# Altium PCB uart.PcbDoc (part 1 of 3)
Units mil, origin at the board's own origin, x right, y up, seen from the top; angles counter-clockwise.
Board outline 2765.94 x 3947.04 mil, 2 copper layers (Top Layer, Bottom Layer); 105 components, 93 nets, 344 pads, 42 vias.
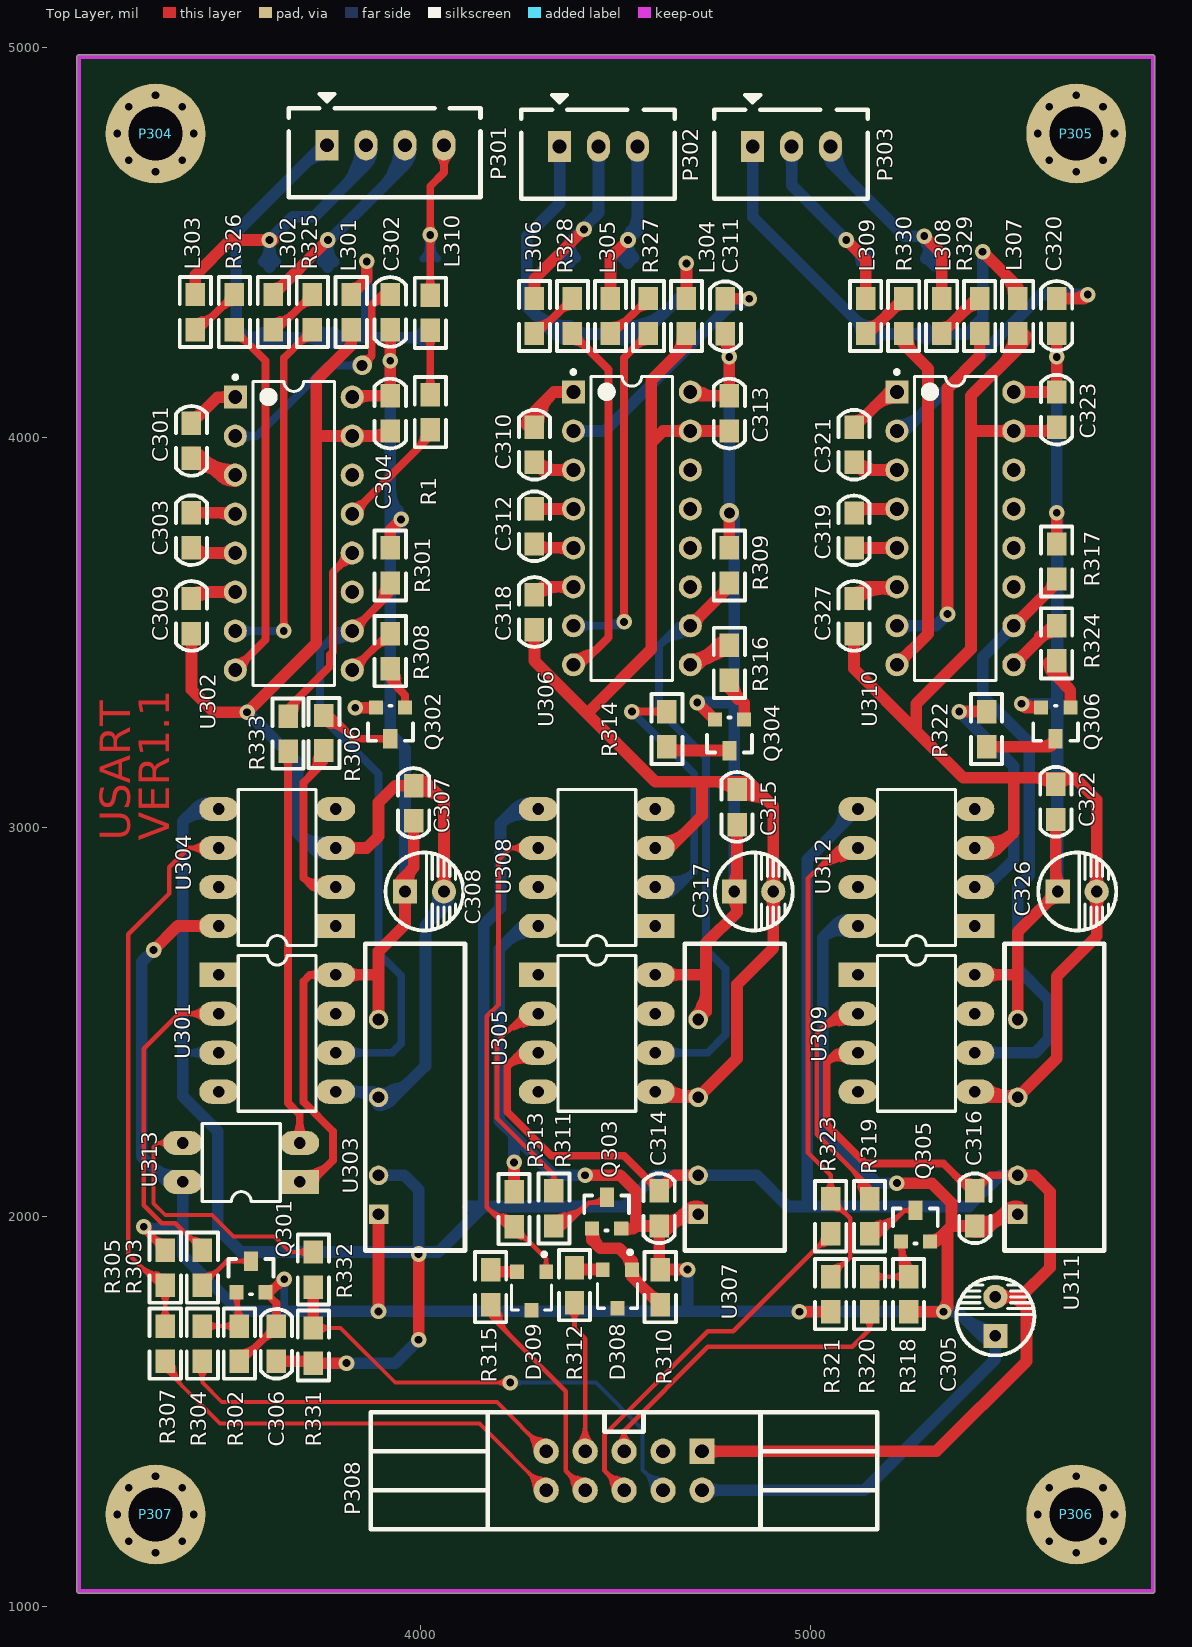
[diagram p0: Top Layer view]
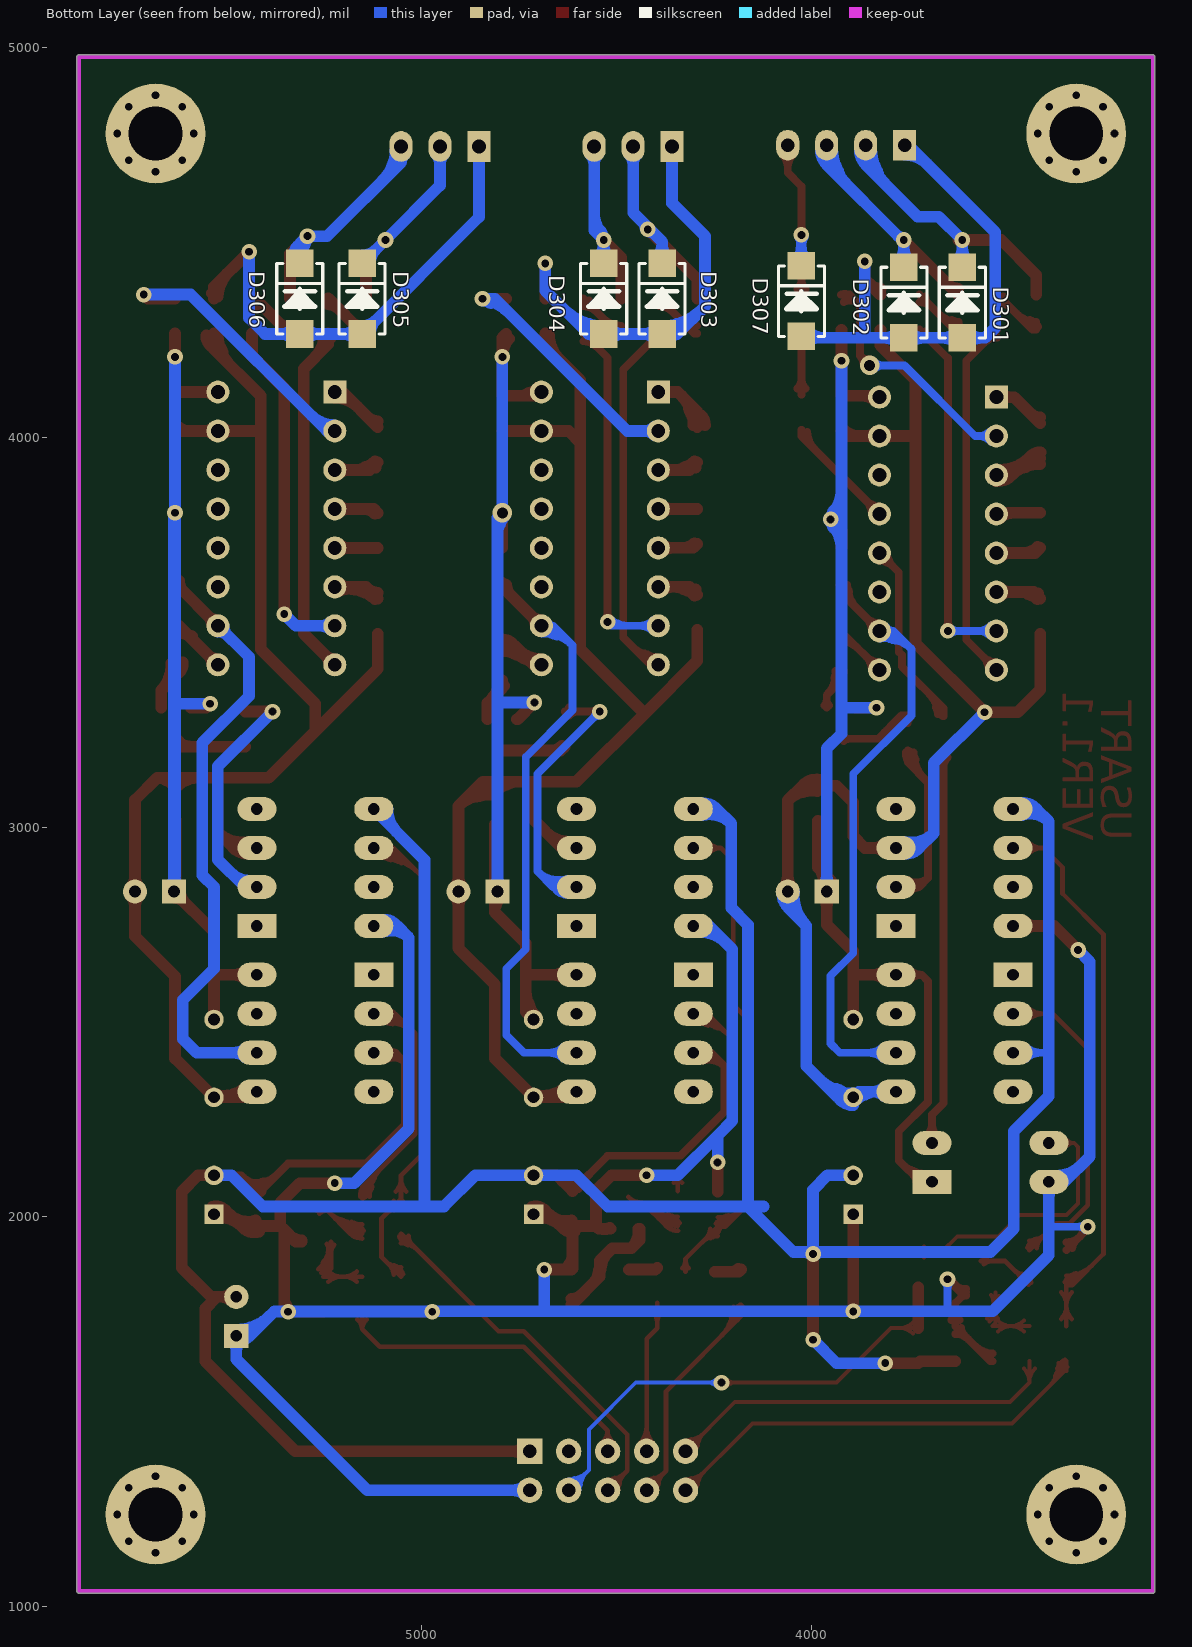
[diagram p1: Bottom Layer view, seen from below]

## Layer stack, top to bottom
Top Layer: signal copper 1.4
Dielectric: dielectric 12.6, FR-4, Dk 4.8
Bottom Layer: signal copper 1.4

## Board outline
3118.13,1039.84 ccw(c3123.15,1039.84) 3123.15,1034.83 5879.06,1034.83 ccw(c5879.06,1039.84) 5884.07,1039.84 5884.07,4976.85 ccw(c5879.06,4976.85) 5879.06,4981.87 3123.15,4981.87 ccw(c3123.15,4976.85) 3118.13,4976.85

## Design rules (kind name [scope] priority, off if disabled: settings)
Clearance [All] p1: gap=10
ComponentClearance [All] p1: gap=0 collisioncheckmode=3 verticalgap=0 showdistances=FALSE
PolygonConnect [All] p1: connectstyle=Relief reliefconductorwidth=10 reliefentries=4 polygonreliefangle="90 Angle"
RoomDefinition uart [InComponentClass('uart')] p1 off: confinementstyle=ConfineIn formatcopy=TRUE lockcomponents=FALSE outline 3173.31,1086.3 5833.31,1086.3 5833.31,4926.3 3173.31,4926.3
RoutingVias [All] p1: holewidth=28 width=50 viastyle="Through Hole" minholewidth=20 minwidth=40 maxholewidth=28 maxwidth=50
SilkscreenOverComponentPads [All] p1: minsilkscreentomaskgap=10
SolderMaskExpansion [All] p1: expansion=4
Width [All] p1: maxlimit=100 minlimit=10 preferedwidth=10
26 further rules are at their usual default settings.

## Components (designator, comment, footprint, x,y, rotation, side; value= is the part's Value field where it differs from the comment)
C301 "100nF" C0805 3412.2,4036.85 r270 top
C302 "100nF" C0805 3922.2,4276.85 r90 top
C303 "100nF" C0805 3412.2,3716.85 r90 top
C304 "100nF" C0805 3922.2,4106.85 r270 top
C305 "100uF/16V" CD1/2 5475,1795 r0 top
C306 "100nF" C0805 3630,1720 r270 top
C307 "100nF" C0805 3982.2,3016.85 r90 top
C308 "47uF/16V" CD1/2 4060,2835 r270 top
C309 "100nF" C0805 3412.2,3496.85 r90 top
C310 "100nF" C0805 4292.2,4026.85 r270 top
C311 "100nF" C0805 4782.2,4265.85 r90 top
C312 "100nF" C0805 4292.2,3726.85 r90 top
C313 "100nF" C0805 4792.2,4106.85 r270 top
C314 "100nF" C0805 4612.2,1976.85 r90 top
C315 "100nF" C0805 4812.2,3006.85 r90 top
C316 "100nF" C0805 5422.2,1976.85 r90 top
C317 "47uF/16V" CD1/2 4905,2835 r270 top
C318 "100nF" C0805 4292.2,3506.85 r90 top
C319 "100nF" C0805 5112.2,4026.85 r270 top
C320 "100nF" C0805 5632.2,4266.85 r90 top
C321 "100nF" C0805 5112.2,3716.44 r90 top
C322 "100nF" C0805 5630,3020 r90 top
C323 "100nF" C0805 5632.2,4116.85 r270 top
C326 "47uF/16V" CD1/2 5735,2835 r270 top
C327 "100nF" C0805 5112.2,3496.85 r90 top
D301 "SMA6J18CA" SMA 3612.2,4346.3 r90 bottom
D302 "SMA6J18CA" SMA 3762.2,4346.3 r90 bottom
D303 "SMA6J18CA" SMA 4382.2,4356.3 r90 bottom
D304 "SMA6J18CA" SMA 4532.2,4356.3 r90 bottom
D305 "SMA6J18CA" SMA 5152.2,4356.3 r90 bottom
D306 "SMA6J18CA" SMA 5312.2,4356.3 r90 bottom
D307 "SMA6J18CA" SMA 4025,4350 r90 bottom
D308 "BAV99" SOT-23#1 4505,1815 r180 top
D309 "BAV99" SOT-23#1 4285,1810 r180 top
L301 "BLM21AG601SN1" L0805 3822.2,4276.85 r90 top
L302 "BLM21AG601SN1" L0805 3622.2,4276.85 r90 top
L303 "BLM21AG601SN1" L0805 3422.2,4276.85 r90 top
L304 "BLM21AG601SN1" L0805 4682.2,4266.85 r90 top
L305 "BLM21AG601SN1" L0805 4487.2,4266.85 r90 top
L306 "BLM21AG601SN1" L0805 4292.2,4266.85 r90 top
L307 "BLM21AG601SN1" L0805 5532.2,4266.85 r90 top
L308 "BLM21AG601SN1" L0805 5337.2,4266.85 r90 top
L309 "BLM21AG601SN1" L0805 5142.2,4266.85 r90 top
L310 "BLM21AG601SN1" L0805 4025,4275 r90 top
P301 "COM1" TJC3-4A 3760,4750 r0 top (schematic designator P1)
P302 "COM1" TJC3-3A 4356.78,4746.85 r0 top
P303 "COM1" TJC3-3A 4852.2,4746.85 r0 top
P304 "Header 9" LK 3320,4780 r0 top
P305 "Header 9" LK 5682.2,4780 r0 top
P306 "Header 9" LK 5682.2,1236.69 r0 top
P307 "Header 9" LK 3320,1236.69 r0 top
P308 "Header 5X2" IDC10-EJ 4722.2,1398.74 r180 top
Q301 "MMBT3906" SOT-23#2 3527.2,1806.85 r0 top
Q302 "MMBT3906" SOT-23#2 3960.2,3306.85 r180 top
Q303 "MMBT3906" SOT-23#2 4440,1970 r0 top
Q304 "MMBT3906" SOT-23#2 4830.2,3276.85 r180 top
Q305 "MMBT3906" SOT-23#2 5232.2,1936.85 r0 top
Q306 "MMBT3906" SOT-23#2 5667.2,3306.85 r180 top
R1 "100" R0805 4025,4110 r270 top
R301 "3.3K" R0805 3922.2,3716.85 r270 top
R302 "10K" R0805 3535,1720 r270 top
R303 "330" R0805 3440,1825 r90 top
R304 "3.3K" R0805 3440,1630 r90 top
R305 "3.3K" R0805 3345,1825 r90 top
R306 "330" R0805 3752.2,3286.85 r270 top
R307 "33" R0805 3345,1720 r270 top
R308 "3.3K" R0805 3922.2,3406.85 r90 top
R309 "3.3K" R0805 4792.2,3716.85 r270 top
R310 "10K" R0805 4615,1775 r90 top
R311 "330" R0805 4342.2,2066.85 r270 top
R312 "3.3K" R0805 4395,1780 r90 top
R313 "3.3K" R0805 4240,1975 r90 top
R314 "330" R0805 4632.2,3206.85 r90 top
R315 "33" R0805 4180,1865 r270 top
R316 "3.3K" R0805 4792.2,3376.85 r90 top
R317 "3.3K" R0805 5632.2,3726.85 r270 top
R318 "10K" R0805 5252.2,1846.85 r270 top
R319 "330" R0805 5152.2,2046.85 r270 top
R320 "3.3K" R0805 5152.2,1756.85 r90 top
R321 "3.3K" R0805 5052.2,1846.85 r270 top
R322 "330" R0805 5452.2,3206.85 r90 top
R323 "33" R0805 5052.2,2046.85 r270 top
R324 "3.3K" R0805 5632.2,3426.85 r90 top
R325 "100" R0805 3722.2,4366.85 r270 top
R326 "100" R0805 3522.2,4366.85 r270 top
R327 "100" R0805 4584.7,4356.85 r270 top
R328 "100" R0805 4389.7,4356.85 r270 top
R329 "100" R0805 5434.7,4356.85 r270 top
R330 "100" R0805 5239.7,4356.85 r270 top
R331 "10K" R0805 3725,1625 r90 top
R332 "5.1K" R0805 3725,1820 r90 top
R333 "3.3K" R0805 3660,3195 r90 top
U301 "6N137" DIP8 3482.2,2621.42 r0 top
U302 "MAX232ACPE" PE16A 3674.72,3753.7 r0 top
U303 "MORNSUN-BLS" MORNSUN-BLS 3892.2,2006.85 r270 top
U304 "6N137" DIP8 3782.2,2746.85 r180 top
U305 "6N137" DIP8 4302.2,2621.42 r0 top
U306 "MAX232ACPE" PE16A 4542.2,3766.85 r0 top
U307 "MORNSUN-BLS" MORNSUN-BLS 4712.2,2006.85 r270 top
U308 "6N137" DIP8 4602.2,2746.85 r180 top
U309 "6N137" DIP8 5122.2,2621.42 r0 top
U310 "MAX232ACPE" PE16A 5372.2,3766.85 r0 top
U311 "MORNSUN-BLS" MORNSUN-BLS 5532.2,2006.85 r270 top
U312 "6N137" DIP8 5422.2,2746.85 r180 top
U313 "TLP521" DIP4 3690,2090 r90 top

## Footprints (in the part's own frame and the unit in brackets; to place one, negate y for a bottom-side part, rotate by r counter-clockwise, add the part's x,y. Pads: shape width x height; smd on the part's side, far side on the other; paste and mask are expansions set on the pad)
C0805 [mil]
  rect 60x50 smd: 1(0,0) 2(90,0)
  silkscreen extent -44,-40 135,40
CD1/2 [mil]
  rect 62x62 hole 30: 1(0,-100)
  round 62 hole 30: 2(0,0)
  silkscreen extent -100,-150 100,50
DIP4 [mil]
  rect 62x100 hole 30: 1(0,0)
  oval 62x100 hole 30: 2(100,0) 3(100,300) 4(0,300)
  silkscreen extent -50,50 150,250
DIP8 [mil]
  rect 100x62 hole 30: 1(0,0)
  oval 100x62 hole 30: 2(0,-100) 3(0,-200) 4(0,-300) 5(300,-300) 6(300,-200) 7(300,-100) 8(300,0)
  silkscreen extent 50,-350 250,50
IDC10-EJ [mil]
  rect 65x65 hole 35: 1(0,0)
  round 65 hole 35: 2(0,100) 3(100,0) 4(100,100) 5(200,0) 6(200,100) 7(300,0) 8(300,100) 9(400,0) 10(400,100)
  silkscreen extent -450,-100 850,200
L0805 [mil]
  rect 60x50 smd: 1(0,0) 2(90,0)
  silkscreen extent -45,-40 135,40
LK [mm]
  round 6.5 hole 3.5: 1(0,0)
  round 1 hole 0.5: 2(0,2.5) 3(2.5,0) 4(0,-2.5) 5(-1.75,-1.75) 6(-1.75,1.75) 7(1.75,1.75) 8(1.75,-1.75) 9(-2.5,0)
MORNSUN-BLS [mil]
  rect 50x50 hole 30: 1(0,0)
  round 50 hole 30: 2(-100,0) 4(-300,0) 6(-500,0)
  silkscreen extent -694,-34 93,222
PE16A [mm] "DIP, 16-Leads, Row Spacing 7.62mm, Pitch 2.54mm, Body 19.18x6.99mm"
  rect 1.5x1.5 hole 0.9: 1(-3.81,8.89)
  round 1.5 hole 0.9: 2(-3.81,6.35) 3(-3.81,3.81) 4(-3.81,1.27) 5(-3.81,-1.27) 6(-3.81,-3.81) 7(-3.81,-6.35) 8(-3.81,-8.89) 9(3.81,-8.89) 10(3.81,-6.35) 11(3.81,-3.81) 12(3.81,-1.27) 13(3.81,1.27) 14(3.81,3.81) 15(3.81,6.35) 16(3.81,8.89)
  silkscreen extent -3.93,-9.9 2.65,10.31, body extent -3.3,-9.9 3.3,9.9, height 5.08
R0805 [mil]
  rect 60x50 smd: 1(0,0) 2(90,0)
  silkscreen extent -45,-40 135,40
SMA [mm]
  rect 1.8x1.8 smd: 1(-2.3,0) 2(2.3,0)
  silkscreen extent -2.3,-1.5 2.3,1.5
SOT-23#1 [mm] "SOT-23; 3 Leads; Body 3.0 x 2.6 mm, inc. leads (LxW max)"
  rect 0.9x0.95 smd: 1(-0.95,-1.25) 2(0.95,-1.25) 3(0,1.25)
  silkscreen extent -1.3,-2.52 1.3,1.25
SOT-23#2 [mm]
  rect 0.914x0.914 smd: 1(0,0) 2(1.905,0)
  rect 0.914x1.27 smd: 3(0.965,2.032)
  silkscreen extent -0.51,-0.13 2.41,2.16
TJC3-3A [mm]
  rect 1.5x2 hole 0.9: 1(0,0)
  oval 1.5x2 hole 0.9: 2(2.54,0) 3(5.08,0)
  silkscreen extent -2.5,-3.4 7.5,3.35
TJC3-4A [mm]
  rect 1.5x2 hole 0.9: 1(0,0)
  oval 1.5x2 hole 0.9: 2(2.54,0) 3(5.08,0) 4(7.62,0)
  silkscreen extent -2.5,-3.4 10,3.35

## Part data
C305 C308 C317 C326: library part CD1, "Electrolytic C"
D301 D302 D303 D304 D305 D306 D307: library part "Bidirectional DIODE"
D308 D309: "Silicon Switching Diode Array for High-Speed Switching"
P301: library part "Header 4", "Header, 4"
P302 P303: library part "Header 3", "Header, 3"
P304 P305 P306 P307: "Header, 9"
P308: "Header, 5-Pin, Dua"
Q301 Q302 Q303 Q304 Q305 Q306: library part PNP_SOT23
U302 U306 U310: "+5V Powered, Multi-Channel RS-232 Driver/Receiver"
U303 U307 U311: "MORNSUN Fixed input,Isolated"

## Via types
v1: diameter 40, hole 20, Top Layer to Bottom Layer, 40 vias
v2: diameter 50, hole 28, Top Layer to Bottom Layer, 2 vias

## Nets (pads, with @x,y where several pads share a name; then routed paths per layer and width w, separated by ;. In a path a pad name is that pad's centre, name@x,y a point inside that pad or via, vN(x,y) a via of type N, cw(c..) or ccw(c..) an arc to the next point about the centre after c; other vN are vias at no path point)
+5V: C305.1 C306.1 C314.1 C316.1 P308.2 Q301.2 Q303.2 Q305.2 R302.2 R305.2 R310.2 R313.2 R318.2 R321.2 U303.1 U304.8 U307.1 U308.8 U311.1 U312.8 U313.4 | length 12800.6
  Top Layer w20: v1(3290,1975) 3290,1970 R305.2@3345,1915 ; R302.2@3535,1630 3540,1630 C306.1@3630,1720 3630,1779.06 Q301.2@3602.2,1806.85 3616.85,1806.85 v1(3650,1840) ; Q301.2@3609.13,1802.85 cw(c3648.71,1780) 3636.88,1824.14 ; Q301.2@3617.68,1813.06 ccw(c3593.36,1855.18) v1@3640.34,1842.59 ; 3628.35,1821.82 cw(c3643.75,1812.92) v1@3647.75,1830.26 ; 3633.29,1822.07 ccw(c3626.01,1834.69) v1@3640.24,1837.84 ; Q301.2@3615.86,1793.19 cw(c3629.52,1806.85) 3610.2,1806.85 ccw(c3629.52,1806.85) Q301.2@3615.86,1793.19 ; Q301.2@3615.86,1793.19 ccw(c3602.2,1779.54) 3602.2,1798.85 cw(c3602.2,1779.54) Q301.2@3615.86,1793.19 ; 3623.77,1821 ccw(c3605.99,1851.79) v1@3640.34,1842.59 ; 3623.77,1821 ccw(c3605.99,1851.79) v1@3640.34,1842.59 ; 3623.77,1821 ccw(c3605.99,1851.79) v1@3640.34,1842.59 ; 3630,1761.21 cw(c3593.79,1761.21) 3619.39,1735.61 ccw(c3593.79,1761.21) 3630,1761.21 ; 3630,1761.21 ccw(c3666.21,1761.21) 3640.61,1735.61 cw(c3666.21,1761.21) 3630,1761.21 ; 3632.93,1822.93 cw(c3650,1805.86) 3650,1830 ccw(c3650,1805.86) 3632.93,1822.93 ; 3632.93,1822.93 ccw(c3615.86,1840) 3640,1840 cw(c3615.86,1840) 3632.93,1822.93 ; v1@3300,1975 ccw(c3336.21,1975) 3310.61,1949.39 cw(c3336.21,1975) v1@3300,1975 ; 3310.86,1949.14 ccw(c3345,1983.28) 3345,1935 cw(c3345,1983.28) 3310.86,1949.14 ; R305.2@3322.93,1937.07 cw(c3305.86,1920) 3330,1920 ccw(c3305.86,1920) R305.2@3322.93,1937.07 ; R302.2@3535,1650 ccw(c3535,1710.36) 3577.68,1667.68 cw(c3535,1710.36) R302.2@3535,1650 ; 3595.86,1685.86 cw(c3630,1651.72) 3630,1700 ccw(c3630,1651.72) 3595.86,1685.86 ; Q301.2@3602.2,1814.85 ccw(c3602.2,1869.52) 3640.86,1830.86 cw(c3602.2,1869.52) Q301.2@3602.2,1814.85 ; C306.1@3607.93,1697.93 ccw(c3590.86,1715) 3615,1715 cw(c3590.86,1715) C306.1@3607.93,1697.93
  Top Layer w30: v1(3315,2685) 3376.85,2746.85 U304.8@3482.2,2746.85 ; v1(3892.2,1757.8) U303.1@3892.2,2006.85 ; R313.2@4240,2065 v1(4240,2140) ; v1(4422.2,2106.85) 4512.2,2106.85 4552.2,2066.85 4552.2,1976.85 ; Q303.2@4515,1970 4545.35,1970 4552.2,1976.85 ; C314.1@4619.27,1974.77 cw(c4659.61,1934.33) 4659.68,1991.45 ; 4665.34,1994.61 ccw(c4662.22,2051.65) U307.1@4704.76,2013.52 ; v1(4685,1865) R310.2@4615,1865 4612.2,1867.8 C314.1@4612.2,1976.85 ; U307.1@4712.2,2006.85 4672.2,2006.85 ; v1(4972.2,1756.85) R321.2@5052.2,1756.85 ; v1(5222.2,2086.85) 5312.2,2086.85 5362.2,2036.85 5362.2,1976.85 ; R318.2@5252.2,1756.85 v1(5342.2,1756.85) 5352.2,1766.85 5352.2,1966.85 ; Q305.2@5307.2,1936.85 5322.2,1936.85 5352.2,1966.85 ; v1@5346.98,1758.34 cw(c5371.32,1765.94) 5349.24,1778.69 ; C316.1@5430.24,1975.89 cw(c5456.6,1956.34) 5458.79,1989.09 ; 5485.34,1994.61 ccw(c5482.22,2051.65) U311.1@5524.76,2013.52 ; U311.1@5532.2,2006.85 5492.2,2006.85 ; 3424.58,2746.85 cw(c3424.58,2708.22) 3451.89,2735.54 ccw(c3424.58,2708.22) 3424.58,2746.85 ; 3424.58,2746.85 ccw(c3424.58,2785.48) 3451.89,2758.16 cw(c3424.58,2785.48) 3424.58,2746.85 ; 4552.2,1976.85 cw(c4531.65,1997.4) 4516.56,1972.56 ccw(c4531.65,1997.4) 4552.2,1976.85 ; 4552.2,1976.85 C314.1@4612.2,1976.85 ; C314.1@4612.2,1976.85 4642.2,1976.85 ; 4642.21,1976.85 cw(c4694.84,1924.22) 4710.15,1997.06 ccw(c4694.84,1924.22) 4642.21,1976.85 ; 4642.2,1976.85 4672.2,2006.85 ; 4672.2,2006.85 cw(c4630.24,2048.82) 4614.8,1991.51 ccw(c4630.24,2048.82) 4672.2,2006.85 ; 5352.2,1966.85 5362.2,1976.85 ; 5362.2,1976.85 C316.1@5422.2,1976.85 5462.2,1976.85 ; 5462.21,1976.85 cw(c5514.84,1924.22) 5530.15,1997.06 ccw(c5514.84,1924.22) 5462.21,1976.85 ; 5462.2,1976.85 5492.2,2006.85 ; 5492.2,2006.85 cw(c5446.34,2052.71) 5425.43,1991.32 ccw(c5446.34,2052.71) 5492.2,2006.85 ; C314.1@4607,1962.54 ccw(c4614.67,1991) 4635.51,1970.16 cw(c4614.67,1991) C314.1@4607,1962.54 ; 4612.2,1900.89 ccw(c4645.89,1900.89) 4622.07,1877.07 cw(c4645.89,1900.89) 4612.2,1900.89 ; 4681.39,2016.03 cw(c4708.45,1988.97) 4716.32,2026.42 ccw(c4708.45,1988.97) 4681.39,2016.03 ; Q305.2@5307.2,1939.85 ccw(c5307.2,1983.31) 5337.93,1952.58 cw(c5307.2,1983.31) Q305.2@5307.2,1939.85 ; v1@5338.67,1760.39 ccw(c5305.99,1793.06) 5352.2,1793.06 cw(c5305.99,1793.06) v1@5338.67,1760.39 ; C316.1@5415.76,1962.92 ccw(c5429.03,2001.88) 5458.13,1972.77 cw(c5429.03,2001.88) C316.1@5415.76,1962.92 ; 5501.39,2016.03 cw(c5528.45,1988.97) 5536.32,2026.42 ccw(c5528.45,1988.97) 5501.39,2016.03
  Bottom Layer w20: v1(3290,1975) 3385,1975 3390,1970 ; 3385,1915 3390,1920 ; 3650,1757.8 v1(3650,1840) ; 3314.14,1975 cw(c3314.14,1999.14) 3297.07,1982.07 ccw(c3314.14,1999.14) 3314.14,1975 ; 3314.14,1975 ccw(c3314.14,1950.86) 3297.07,1967.93 cw(c3314.14,1950.86) 3314.14,1975 ; 3650,1815.86 cw(c3674.14,1815.86) 3657.07,1832.93 ccw(c3674.14,1815.86) 3650,1815.86 ; 3650,1815.86 ccw(c3625.86,1815.86) 3642.93,1832.93 cw(c3625.86,1815.86) 3650,1815.86
  Bottom Layer w30: v1(3315,2685) 3285,2655 3285,2155 3350,2090 U313.4@3390,2090 3390,1970 3390,1920 3390,1901.85 3534.06,1757.8 3650,1757.8 v1(3892.2,1757.8) 4685,1757.8 ; v1(4240,2140) 4240,2209.06 ; U308.8@4302.2,2746.85 4262.2,2746.85 4202.2,2686.85 4202.2,2246.85 4240,2209.06 ; v1(4422.2,2106.85) 4342.2,2106.85 4240,2209.06 ; v1(4685,1865) 4685,1757.8 ; P308.2@4722.2,1298.74 5138.74,1298.74 5475,1635 C305.1@5475,1695 5440,1695 ; v1(4972.2,1756.85) v1(5342.2,1756.85) 5378.15,1756.85 ; U312.8@5122.2,2746.85 5062.2,2746.85 5032.2,2716.85 ; v1(5222.2,2086.85) 5172.2,2086.85 5032.2,2226.85 5032.2,2716.85 ; 5405.65,1729.58 cw(c5381.99,1641.3) C305.1@5461.14,1687 ; 3390,2051.37 cw(c3428.63,2051.37) 3401.31,2078.69 ccw(c3428.63,2051.37) 3390,2051.37 ; 3390,2051.37 ccw(c3351.37,2051.37) 3378.69,2078.69 cw(c3351.37,2051.37) 3390,2051.37 ; 4685,1757.8 5377.2,1757.8 5378.15,1756.85 ; 4764.45,1298.74 cw(c4764.45,1340.99) 4734.58,1311.11 ccw(c4764.45,1340.99) 4764.45,1298.74 ; 4764.45,1298.74 ccw(c4764.45,1256.49) 4734.58,1286.37 cw(c4764.45,1256.49) 4764.45,1298.74 ; 5032.21,2716.85 cw(c5076.88,2672.18) 5097.88,2731.76 ccw(c5076.88,2672.18) 5032.21,2716.85 ; 5064.58,2746.85 cw(c5064.58,2708.22) 5091.89,2735.54 ccw(c5064.58,2708.22) 5064.58,2746.85 ; 5064.58,2746.85 ccw(c5064.58,2785.48) 5091.89,2758.16 cw(c5064.58,2785.48) 5064.58,2746.85 ; 5378.15,1756.85 5440,1695 ; 5440,1695 cw(c5440,1664.72) 5462.9,1684.53 ccw(c5440,1664.72) 5440,1695 ; 5440,1695 ccw(c5440,1725.28) 5462.9,1705.47 cw(c5440,1725.28) 5440,1695 ; 5475,1656.37 cw(c5513.63,1656.37) 5486.31,1683.69 ccw(c5513.63,1656.37) 5475,1656.37 ; 5475,1656.37 ccw(c5436.37,1656.37) 5463.69,1683.69 cw(c5436.37,1656.37) 5475,1656.37 ; 3307.84,2132.16 ccw(c3371,2195.33) 3371,2106 cw(c3371,2195.33) 3307.84,2132.16 ; 4220.04,2704.69 cw(c4283.2,2641.52) 4283.2,2730.85 ccw(c4283.2,2641.52) 4220.04,2704.69 ; 5065.88,2750.52 cw(c5094.43,2721.97) 5107.86,2760.05 ccw(c5094.43,2721.97) 5065.88,2750.52 ; 5387.94,1747.06 ccw(c5475,1834.12) 5475,1711 cw(c5475,1834.12) 5387.94,1747.06 ; 5439.15,1695.85 ccw(c5475,1731.7) 5475,1681 cw(c5475,1731.7) 5439.15,1695.85
+5V_1: C302.1 C304.1 C307.1 C308.1 Q302.2 R301.1 U301.8 U302.16 U303.6 U313.1 | length 4903.2
  Top Layer w20: U313.1@3690,2090 3720,2090 3775,2145 3775,2220 3700,2295 3700,2605 3716.42,2621.42 ; U313.1@3709.94,2089.65 cw(c3756.85,2071.89) 3743.87,2120.34 ; U301.8@3782.2,2621.42 3716.42,2621.42 ; 3716.42,2621.42 cw(c3716.42,2579.8) 3747.51,2607.46 ccw(c3716.42,2579.8) 3716.42,2621.42 ; 3716.42,2621.42 ccw(c3716.42,2663.03) 3747.51,2635.37 cw(c3716.42,2663.03) 3716.42,2621.42 ; U313.1@3709,2111 ccw(c3709,2188.25) 3763.63,2133.63 cw(c3709,2188.25) U313.1@3709,2111 ; U313.1@3730,2090 cw(c3754.14,2090) 3737.07,2107.07 ccw(c3754.14,2090) U313.1@3730,2090
  Top Layer w30: U301.8@3782.2,2621.42 3886.77,2621.42 3892.2,2626.85 ; U302.16@3824.72,4103.7 3827.87,4106.85 C304.1@3922.2,4106.85 v1(3922.2,4196.85) C302.1@3922.2,4276.85 ; v1(3832.2,3306.85) Q302.2@3885.2,3306.85 ; U303.6@3892.2,2506.85 3892.2,2626.85 ; R301.1@3922.2,3716.85 3922.2,3762.2 v1(3950,3790) ; C307.1@3982.2,3016.85 3982.2,2896.85 ; 3839.83,2621.42 cw(c3839.83,2660.04) 3812.52,2632.73 ccw(c3839.83,2660.04) 3839.83,2621.42 ; 3839.83,2621.42 ccw(c3839.83,2582.79) 3812.52,2610.1 cw(c3839.83,2582.79) 3839.83,2621.42 ; 3892.2,2626.85 3892.2,2682.2 3960,2750 C308.1@3960,2835 3960,2874.65 3982.2,2896.85 ; 3960,2796.37 cw(c3998.63,2796.37) 3971.31,2823.69 ccw(c3998.63,2796.37) 3960,2796.37 ; 3960,2796.37 ccw(c3921.37,2796.37) 3948.69,2823.69 cw(c3921.37,2796.37) 3960,2796.37 ; 3960,2873.63 cw(c3921.37,2873.63) 3948.69,2846.31 ccw(c3921.37,2873.63) 3960,2873.63 ; 3960,2873.63 ccw(c3998.63,2873.63) 3971.31,2846.31 cw(c3998.63,2873.63) 3960,2873.63 ; 3982.2,2896.85 ccw(c4014.82,2864.23) 3974.12,2842.53 cw(c4014.82,2864.23) 3982.2,2896.85 ; U302.16@3835,4093.43 cw(c3867.4,4061.02) 3867.4,4106.85 ccw(c3867.4,4061.02) U302.16@3835,4093.43 ; C308.1@3947.65,2828.41 cw(c3977.47,2844.32) 3953.57,2868.22 ccw(c3977.47,2844.32) C308.1@3947.65,2828.41
  Bottom Layer w30: v1(3832.2,3306.85) 3922.2,3306.85 ; v1(3922.2,4196.85) 3922.2,3785 ; 3942.32,3767.03 ccw(c3917.58,3781.31) v1@3945.17,3788.71 ; 3942.32,3812.97 cw(c3917.58,3798.69) v1@3945.17,3791.29 ; v1(3950,3790) 3927.2,3790 3922.2,3785 ; C308.1@3960,2835 3960,3202.2 3922.2,3240 3922.2,3306.85 ; 3922.2,3306.85 3922.2,3785 ; 3922.21,3785 cw(c3935.14,3772.07) 3946.81,3786.15 ccw(c3935.14,3772.07) 3922.21,3785 ; 3960,2873.63 cw(c3921.37,2873.63) 3948.69,2846.31 ccw(c3921.37,2873.63) 3960,2873.63 ; 3960,2873.63 ccw(c3998.63,2873.63) 3971.31,2846.31 cw(c3998.63,2873.63) 3960,2873.63 ; 3922.2,3710.83 cw(c4029.17,3710.83) 3953.54,3786.46 ccw(c4029.17,3710.83) 3922.2,3710.83 ; 3922.2,3783.25 cw(c3956.75,3783.25) 3932.32,3807.68 ccw(c3956.75,3783.25) 3922.2,3783.25 ; 3922.2,3796.75 ccw(c3956.75,3796.75) 3932.32,3772.32 cw(c3956.75,3796.75) 3922.2,3796.75 ; 3922.2,3869.17 ccw(c4029.17,3869.17) 3953.54,3793.54 cw(c4029.17,3869.17) 3922.2,3869.17
+5V_2: C311.1 C313.1 C315.1 C317.1 Q304.2 R309.1 U305.8 U306.16 U307.6 | length 3575
  Top Layer w30: U305.8@4602.2,2621.42 4726.77,2621.42 4732.2,2626.85 ; U306.16@4692.2,4116.85 4702.2,4106.85 C313.1@4792.2,4106.85 v1(4792.2,4206.85) 4792.2,4255.85 C311.1@4782.2,4265.85 ; U306.16@4704.02,4108.4 cw(c4717.93,4098.44) 4726.49,4113.26 ; v1(4710,3320) 4753.15,3276.85 Q304.2@4755.2,3276.85 ; U307.6@4712.2,2506.85 4732.2,2526.85 4732.2,2626.85 ; U307.6@4721.75,2509.83 cw(c4770.43,2525.03) 4726.27,2550.52 ; 4787.43,4232.48 cw(c4803.55,4241.79) C311.1@4789.66,4254.19 ; R309.1@4792.2,3716.85 v2(4792.2,3806.85) ; C315.1@4812.2,3006.85 4812.2,2782.2 4732.2,2702.2 4732.2,2626.85 ; 4659.83,2621.42 cw(c4659.83,2660.04) 4632.52,2632.73 ccw(c4659.83,2660.04) 4659.83,2621.42 ; 4659.83,2621.42 ccw(c4659.83,2582.79) 4632.52,2610.1 cw(c4659.83,2582.79) 4659.83,2621.42 ; U306.16@4702.48,4127.12 ccw(c4751.42,4176.06) 4751.42,4106.85 cw(c4751.42,4176.06) U306.16@4702.48,4127.12 ; U307.6@4705.13,2513.92 ccw(c4639.78,2579.28) 4732.2,2579.28 cw(c4639.78,2579.28) U307.6@4705.13,2513.92 ; C311.1@4775.13,4253.78 cw(c4733.92,4212.57) 4792.2,4212.57 ccw(c4733.92,4212.57) C311.1@4775.13,4253.78 ; C317.1@4793.69,2846.31 ccw(c4748.98,2891.02) 4812.2,2891.02 cw(c4748.98,2891.02) C317.1@4793.69,2846.31 ; C317.1@4794.1,2823.29 cw(c4755.43,2781.72) 4812.2,2781.72 ccw(c4755.43,2781.72) C317.1@4794.1,2823.29
  Bottom Layer w30: v1(4710,3320) 4799.53,3320 4805,3314.53 ; v1(4792.2,4206.85) v2(4792.2,3806.85) 4805,3794.06 4805,3314.53 ; 4799.9,3774.2 cw(c4822.48,3787.24) v2@4800.6,3801.41 ; C317.1@4805,2835 4805,3314.53 ; 4805,2873.63 cw(c4766.37,2873.63) 4793.69,2846.31 ccw(c4766.37,2873.63) 4805,2873.63 ; 4805,2873.63 ccw(c4843.63,2873.63) 4816.31,2846.31 cw(c4843.63,2873.63) 4805,2873.63 ; v2@4785.13,3799.78 cw(c4737.17,3751.82) 4805,3751.82 ccw(c4737.17,3751.82) v2@4785.13,3799.78
+5V_3: C320.1 C322.1 C323.1 C326.1 Q306.2 R317.1 U309.8 U310.16 U311.6 | length 4347.1
  Top Layer w30: U309.8@5422.2,2621.42 5526.77,2621.42 5532.2,2626.85 ; U310.16@5522.2,4116.85 C323.1@5632.2,4116.85 v1(5632.2,4206.85) C320.1@5632.2,4266.85 ; U311.6@5532.2,2506.85 5532.2,2626.85 ; v1(5542.2,3316.85) 5552.2,3306.85 Q306.2@5592.2,3306.85 ; v1@5543.69,3312.08 cw(c5551.29,3287.74) 5564.04,3309.82 ; C322.1@5630,3020 5630,2840 C326.1@5635,2835 5532.2,2732.2 5532.2,2626.85 ; R317.1@5632.2,3726.85 v1(5632.2,3806.85) ; 5479.83,2621.42 cw(c5479.83,2660.04) 5452.52,2632.73 ccw(c5479.83,2660.04) 5479.83,2621.42 ; 5479.83,2621.42 ccw(c5479.83,2582.79) 5452.52,2610.1 cw(c5479.83,2582.79) 5479.83,2621.42 ; 5557.28,4116.85 cw(c5557.28,4151.92) 5532.48,4127.12 ccw(c5557.28,4151.92) 5557.28,4116.85 ; 5557.28,4116.85 ccw(c5557.28,4081.78) 5532.48,4106.58 cw(c5557.28,4081.78) 5557.28,4116.85 ; C326.1@5607.69,2807.69 cw(c5635,2780.37) 5635,2819 ccw(c5635,2780.37) C326.1@5607.69,2807.69 ; C326.1@5607.69,2807.69 ccw(c5580.37,2835) 5619,2835 cw(c5580.37,2835) C326.1@5607.69,2807.69 ; v1@5545.74,3320.39 ccw(c5578.42,3353.06) 5578.42,3306.85 cw(c5578.42,3353.06) v1@5545.74,3320.39 ; 5630,2885.7 ccw(c5685.7,2885.7) 5646.31,2846.31 cw(c5685.7,2885.7) 5630,2885.7
  Bottom Layer w30: v1(5542.2,3316.85) 5632.2,3316.85 ; v1(5632.2,4206.85) v1(5632.2,3806.85) ; C326.1@5635,2835 5635,3804.06 v1(5632.2,3806.85) ; C326.1@5623.69,2846.31 ccw(c5596.37,2873.63) 5635,2873.63 ; C326.1@5623.69,2846.31 ccw(c5603.12,2866.88) 5632.2,2866.88 ; C326.1@5623.69,2846.31 ccw(c5603.12,2866.88) 5632.2,2866.88 ; C326.1@5623.69,2846.31 ccw(c5596.37,2873.63) 5635,2873.63 ; C326.1@5623.69,2846.31 ccw(c5603.12,2866.88) 5632.2,2866.88 ; C326.1@5623.69,2846.31 ccw(c5603.12,2866.88) 5632.2,2866.88 ; 5632.2,2876.85 ccw(c5672.19,2876.85) 5645.63,2846.96 cw(c5672.19,2876.85) 5632.2,2876.85 ; 5632.2,2876.85 5632.2,3316.85 ; 5632.2,3316.85 v1(5632.2,3806.85) ; 5635,2873.63 ccw(c5673.63,2873.63) C326.1@5646.31,2846.31 ; 5635,2873.63 ccw(c5673.63,2873.63) C326.1@5646.31,2846.31 ; C326.1@5646.31,2846.31 cw(c5680.38,2880.38) 5632.2,2880.38 ccw(c5680.38,2880.38) C326.1@5646.31,2846.31
GND: C305.2 C306.2 C314.2 C316.2 P308.1 R331.1 U301.3 U303.2 U304.5 U305.3 U307.2 U308.5 U309.3 U311.2 U312.5 | length 12241.5
  Top Layer w20: U305.3@4302.2,2421.42 4256.77,2421.42 4222.2,2386.85 ; C314.2@4612.2,2066.85 4522.2,2156.85 4335.35,2156.85 4222.2,2270 4222.2,2386.85 ; U309.3@5122.2,2421.42 5066.77,2421.42 ; C316.2@5405.3,2091.38 cw(c5396.54,2058.69) C316.2@5426.65,2074.13 ; C316.2@5412.2,2066.85 5342.2,2136.85 5142.2,2136.85 5042.2,2236.85 5042.2,2396.85 ; C316.2@5422.2,2066.85 5462.2,2106.85 U311.2@5532.2,2106.85 ; 4222.21,2386.85 cw(c4262.06,2346.99) 4277.47,2401.22 ccw(c4262.06,2346.99) 4222.21,2386.85 ; 5042.21,2396.85 cw(c5071.57,2367.49) 5092.58,2403.3 ccw(c5071.57,2367.49) 5042.21,2396.85 ; 5042.2,2396.85 5066.77,2421.42 ; 5066.77,2421.42 cw(c5066.77,2400.32) 5085.03,2410.89 ccw(c5066.77,2400.32) 5066.77,2421.42 ; 5066.77,2421.42 ccw(c5066.77,2442.52) 5085.03,2431.94 cw(c5066.77,2442.52) 5066.77,2421.42 ; C316.2@5422.2,2086.85 cw(c5422.2,2159.28) 5370.99,2108.06 ccw(c5422.2,2159.28) C316.2@5422.2,2086.85 ; C316.2@5422.2,2086.85 ccw(c5422.2,2135.13) 5456.35,2100.99 cw(c5422.2,2135.13) C316.2@5422.2,2086.85 ; 5495.99,2106.85 cw(c5495.99,2070.64) 5521.6,2096.24 ccw(c5495.99,2070.64) 5495.99,2106.85 ; 5495.99,2106.85 ccw(c5495.99,2143.06) 5521.6,2117.46 cw(c5495.99,2143.06) 5495.99,2106.85 ; 4246.28,2410.93 cw(c4272.72,2384.5) 4282.93,2420.46 ccw(c4272.72,2384.5) 4246.28,2410.93 ; 4578.06,2100.99 ccw(c4612.2,2135.13) 4612.2,2086.85 cw(c4612.2,2135.13) 4578.06,2100.99 ; C314.2@4590.13,2088.92 cw(c4573.06,2071.85) 4597.2,2071.85 ccw(c4573.06,2071.85) C314.2@4590.13,2088.92 ; 5060.5,2415.15 cw(c5085.1,2390.56) 5102.7,2420.55 ccw(c5085.1,2390.56) 5060.5,2415.15 ; C316.2@5437.2,2071.85 cw(c5461.35,2071.85) 5444.28,2088.92 ccw(c5461.35,2071.85) C316.2@5437.2,2071.85
  Top Layer w30: C306.2@3630,1630 3720,1630 R331.1@3725,1625 v1(3810,1625) ; v1(3995,1685) v1(3995,1905) ; C314.2@4612.2,2066.85 4652.2,2106.85 U307.2@4712.2,2106.85 ; P308.1@4722.2,1398.74 5323.74,1398.74 5555,1630 5555,1765 5525,1795 ; C316.2@5412.2,2066.85 C316.2@5422.2,2066.85 ; C305.2@5475,1795 5525,1795 ; U311.2@5532.2,2106.85 5573.15,2106.85 5615,2065 5615,1870 5540,1795 5525,1795 ; 4764.45,1398.74 cw(c4764.45,1440.99) 4734.58,1411.11 ccw(c4764.45,1440.99) 4764.45,1398.74 ; 4764.45,1398.74 ccw(c4764.45,1356.49) 4734.58,1386.37 cw(c4764.45,1356.49) 4764.45,1398.74 ; 5513.63,1795 cw(c5513.63,1833.63) 5486.31,1806.31 ccw(c5513.63,1833.63) 5513.63,1795 ; 5513.63,1795 ccw(c5513.63,1756.37) 5486.31,1783.69 cw(c5513.63,1756.37) 5513.63,1795 ; C314.2@4612.2,2081.85 ccw(c4612.2,2118.06) 4637.81,2092.46 cw(c4612.2,2118.06) C314.2@4612.2,2081.85
  Bottom Layer w20: 3391.42,2421.42 U301.3@3482.2,2421.42 ; 3412.51,2421.42 cw(c3412.51,2370.72) 3448.36,2406.57 ccw(c3412.51,2370.72) 3412.51,2421.42 ; 3412.51,2421.42 ccw(c3412.51,2472.12) 3448.36,2436.27 cw(c3412.51,2472.12) 3412.51,2421.42
  Bottom Layer w30: U304.5@3482.2,3046.85 3421.85,3046.85 3390,3015 ; v1(3810,1625) 3935,1625 v1(3995,1685) ; U303.2@3892.2,2106.85 3958.15,2106.85 3995,2070 v1@3995,1910 ; 4122.2,2026.85 4162.2,2026.85 ; U308.5@4302.2,3046.85 4242.2,3046.85 4205.18,3009.82 4205.18,2792.97 4162.2,2750 4162.2,2026.85 ; U312.5@5122.2,3046.85 4992.2,2916.85 4992.2,2036.85 5002.2,2026.85 ; U311.2@5532.2,2106.85 5487.2,2106.85 5407.2,2026.85 5002.2,2026.85 ; 3390,3015 cw(c3437.8,2967.2) 3458.34,3031.61 ccw(c3437.8,2967.2) 3390,3015 ; 3390,3015 3390,2310 3480,2220 3480,1970 3540,1910 v1@3990,1910 ; 3424.58,3046.85 cw(c3424.58,3008.22) 3451.89,3035.54 ccw(c3424.58,3008.22) 3424.58,3046.85 ; 3424.58,3046.85 ccw(c3424.58,3085.48) 3451.89,3058.16 cw(c3424.58,3085.48) 3424.58,3046.85 ; v1@3990,1910 v1(3995,1905) v1@3995,1910 ; v1@3990,1910 v1@3995,1910 ; v1@3995,1910 4045.35,1910 4162.2,2026.85 ; 4162.2,2026.85 4522.2,2026.85 4602.2,2106.85 U307.2@4712.2,2106.85 4862.2,2106.85 4942.2,2026.85 5002.2,2026.85 ; 4244.58,3046.85 cw(c4244.58,3008.22) 4271.89,3035.54 ccw(c4244.58,3008.22) 4244.58,3046.85 ; 4244.58,3046.85 ccw(c4244.58,3085.48) 4271.89,3058.16 cw(c4244.58,3085.48) 4244.58,3046.85 ; 3424.83,3049.83 cw(c3454.65,3020.02) 3467.46,3060.19 ccw(c3454.65,3020.02) 3424.83,3049.83 ; 3970.86,1910 cw(c3970.86,1880.86) 3991.46,1901.46 ccw(c3970.86,1880.86) 3970.86,1910 ; v1@3998.54,1901.46 cw(c4019.14,1880.86) 4019.14,1910 ccw(c4019.14,1880.86) v1@3998.54,1901.46 ; 4205.18,3009.83 cw(c4261.78,2953.22) 4279.64,3031.25 ccw(c4261.78,2953.22) 4205.18,3009.83 ; 4243.54,3048.18 cw(c4276.07,3015.65) 4286.33,3060.5 ccw(c4276.07,3015.65) 4243.54,3048.18 ; 5062.46,2987.1 ccw(c5002.71,3046.85) 5087.2,3046.85 cw(c5002.71,3046.85) 5062.46,2987.1
GND_5V_1: C304.2 C307.2 C308.2 C309.1 L301.1 U301.5 U302.15 U303.4 U304.3 | length 5643.9
  Top Layer w30: C309.1@3412.2,3496.85 3412.2,3352.8 3470,3295 v1(3555,3295) 3732.2,3472.2 3732.2,4146.85 3822.2,4236.85 L301.1@3822.2,4276.85 ; 3749.06,4003.7 U302.15@3824.72,4003.7 3909.06,4003.7 C304.2@3922.2,4016.85 ; U304.3@3782.2,2946.85 3862.2,2946.85 3892.2,2976.85 3892.2,3064.06 3935,3106.85 C307.2@3982.2,3106.85 4022.2,3106.85 4060,3069.06 ; C307.2@3989.72,3108.45 ccw(c4032.65,3146.13) 4028.94,3089.13 ; C308.2@4060,2835 4060,3069.06 ; 3789.65,4003.7 cw(c3789.65,3968.63) 3814.45,3993.43 ccw(c3789.65,3968.63) 3789.65,4003.7 ; 3789.65,4003.7 ccw(c3789.65,4038.77) 3814.45,4013.97 cw(c3789.65,4038.77) 3789.65,4003.7 ; 3839.83,2946.85 cw(c3839.83,2985.48) 3812.52,2958.16 ccw(c3839.83,2985.48) 3839.83,2946.85 ; 3839.83,2946.85 ccw(c3839.83,2908.22) 3812.52,2935.54 cw(c3839.83,2908.22) 3839.83,2946.85 ; 3859.8,4003.7 cw(c3859.8,4038.77) 3835,4013.97 ccw(c3859.8,4038.77) 3859.8,4003.7 ; 3859.8,4003.7 ccw(c3859.8,3968.63) 3835,3993.43 cw(c3859.8,3968.63) 3859.8,4003.7 ; 4060,2873.63 cw(c4021.37,2873.63) 4048.69,2846.31 ccw(c4021.37,2873.63) 4060,2873.63 ; 4060,2873.63 ccw(c4098.63,2873.63) 4071.31,2846.31 cw(c4098.63,2873.63) 4060,2873.63 ; 4060,3069.06 ccw(c4000.59,3009.65) 3984.16,3092.04 cw(c4000.59,3009.65) 4060,3069.06 ; 3878.39,4003.7 ccw(c3878.39,4055.67) 3915.13,4018.92 cw(c3878.39,4055.67) 3878.39,4003.7 ; C307.2@3978.29,3121.46 cw(c3987.4,3075.79) 4020.33,3108.72 ccw(c3987.4,3075.79) C307.2@3978.29,3121.46
  Bottom Layer w30: v1(3555,3295) 3685,3165 3685,2985 ; U301.5@3782.2,2321.42 3877.64,2321.42 U303.4@3892.2,2306.85 3931.85,2306.85 4012.5,2387.5 4012.5,2747.5 ; U304.3@3782.2,2946.85 3723.15,2946.85 3685,2985 ; 3856.85,2316.11 ccw(c3872.56,2343.33) U303.4@3887.46,2315.66 ; U303.4@3900.86,2301.85 cw(c3950.33,2273.29) 3935.55,2328.46 ; C308.2@4060,2835 4060,2795 4012.5,2747.5 ; 3685,2985 ccw(c3743.35,3043.34) 3759.98,2962.52 cw(c3743.35,3043.34) 3685,2985 ; 3724.58,2946.85 cw(c3724.58,2908.22) 3751.89,2935.54 ccw(c3724.58,2908.22) 3724.58,2946.85 ; 3724.58,2946.85 ccw(c3724.58,2985.48) 3751.89,2958.16 cw(c3724.58,2985.48) 3724.58,2946.85 ; 3839.83,2321.42 cw(c3839.83,2360.04) 3812.52,2332.73 ccw(c3839.83,2360.04) 3839.83,2321.42 ; 3839.83,2321.42 ccw(c3839.83,2282.79) 3812.52,2310.1 cw(c3839.83,2282.79) 3839.83,2321.42 ; 4012.5,2747.5 ccw(c3935.42,2824.59) 4044.06,2833.67 cw(c3935.42,2824.59) 4012.5,2747.5 ; 4060,2796.37 cw(c4098.63,2796.37) 4071.31,2823.69 ccw(c4098.63,2796.37) 4060,2796.37 ; 4060,2796.37 ccw(c4021.37,2796.37) 4048.69,2823.69 cw(c4021.37,2796.37) 4060,2796.37 ; 3724.38,2945.62 ccw(c3756.79,2978.03) 3766.03,2933.14 cw(c3756.79,2978.03) 3724.38,2945.62 ; 3832.89,2321.42 cw(c3832.89,2247.54) 3885.13,2299.78 ccw(c3832.89,2247.54) 3832.89,2321.42 ; U303.4@3892.2,2286.85 ccw(c3892.2,2334.28) 3925.74,2300.74 cw(c3892.2,2334.28) U303.4@3892.2,2286.85 ; U303.4@3892.2,2316.85 ccw(c3892.2,2436.71) 3976.96,2351.96 cw(c3892.2,2436.71) U303.4@3892.2,2316.85 ; 4058.23,2793.23 ccw(c4019.81,2831.64) 4073.95,2836.17 cw(c4019.81,2831.64) 4058.23,2793.23
GND_5V_2: C313.2 C315.2 C317.2 C318.1 L304.1 U305.5 U306.15 U307.4 U308.3 | length 4971.2
  Top Layer w12: U305.5@4602.2,2321.42 U305.5@4616.77,2306.85
  Top Layer w30: C318.1@4292.2,3506.85 4292.2,3426.85 4422.2,3296.85 ; U308.3@4602.2,2946.85 4639.7,2946.85 4722.2,3029.35 4722.2,3116.85 ; U305.5@4616.77,2306.85 U307.4@4712.2,2306.85 4812.2,2406.85 4812.2,2597.2 4905,2690 C317.2@4905,2835 4905,3054.06 ; U305.5@4632.53,2310.11 cw(c4651.21,2291.47) 4664.4,2314.32 ; 4660.59,4218.51 cw(c4715.77,4203.72) L304.1@4687.2,4253.19 ; L304.1@4682.2,4266.85 4682.2,4236.85 4592.2,4146.85 4592.2,3986.85 ; 4776.18,3111.49 ccw(c4792.59,3139.92) C315.2@4807.63,3110.74 ; C313.2@4792.2,4016.85 U306.15@4692.2,4016.85 4622.2,4016.85 4592.2,3986.85 ; C315.2@4819.77,3098.38 ccw(c4863.01,3135.71) 4858.83,3078.74 ; C315.2@4820.25,3095.91 cw(c4845.56,3077.24) 4847.86,3108.6 ; 4422.2,3296.85 4432.2,3296.85 4592.2,3456.85 4592.2,3986.85 ; 4422.2,3296.85 4602.2,3116.85 4722.2,3116.85 ; 4657.13,4016.85 cw(c4657.13,3981.78) 4681.93,4006.58 ccw(c4657.13,3981.78) 4657.13,4016.85 ; 4657.13,4016.85 ccw(c4657.13,4051.92) 4681.93,4027.12 cw(c4657.13,4051.92) 4657.13,4016.85 ; 4677.35,2311.58 ccw(c4687.53,2349.58) U307.4@4707.2,2315.51 ; 4677.35,2311.58 ccw(c4687.53,2349.58) U307.4@4707.2,2315.51 ; 4677.35,2311.58 ccw(c4687.53,2349.58) U307.4@4707.2,2315.51 ; 4722.2,3116.85 4842.2,3116.85 ; 4727.28,4016.85 cw(c4727.28,4051.92) 4702.48,4027.12 ccw(c4727.28,4051.92) 4727.28,4016.85 ; 4727.28,4016.85 ccw(c4727.28,3981.78) 4702.48,4006.58 cw(c4727.28,3981.78) 4727.28,4016.85 ; 4842.2,3116.85 ccw(c4842.2,3096.35) 4822.04,3100.05 cw(c4842.2,3096.35) 4842.2,3116.85 ; 4842.2,3116.85 4905,3054.06 ; 4905,2796.37 cw(c4943.63,2796.37) 4916.31,2823.69 ccw(c4943.63,2796.37) 4905,2796.37 ; 4905,2796.37 ccw(c4866.37,2796.37) 4893.69,2823.69 cw(c4866.37,2796.37) 4905,2796.37 ; 4905,2873.63 cw(c4866.37,2873.63) 4893.69,2846.31 ccw(c4866.37,2873.63) 4905,2873.63 ; 4905,2873.63 ccw(c4943.63,2873.63) 4916.31,2846.31 cw(c4943.63,2873.63) 4905,2873.63 ; 4905,3054.06 ccw(c4833.13,2982.19) 4814.08,3082.03 cw(c4833.13,2982.19) 4905,3054.06 ; U308.3@4621.2,2962.85 ccw(c4621.2,3046.14) 4680.1,2987.25 cw(c4621.2,3046.14) U308.3@4621.2,2962.85 ; U305.5@4632.52,2332.73 ccw(c4695,2395.21) 4695,2306.85 cw(c4695,2395.21) U305.5@4632.52,2332.73 ; 4647.46,4202.1 ccw(c4587.71,4261.85) 4672.2,4261.85 cw(c4587.71,4261.85) 4647.46,4202.1 ; 4751.85,3116.85 cw(c4751.85,3041.5) 4805.13,3094.78 ccw(c4751.85,3041.5) 4751.85,3116.85 ; C315.2@4808.46,3111.5 cw(c4820.29,3049.48) 4864.93,3094.12 ccw(c4820.29,3049.48) C315.2@4808.46,3111.5